# EAGLE board SAM E70-XplainedShield - DualStepperMotorDriver (EAGLE 9.1.3)
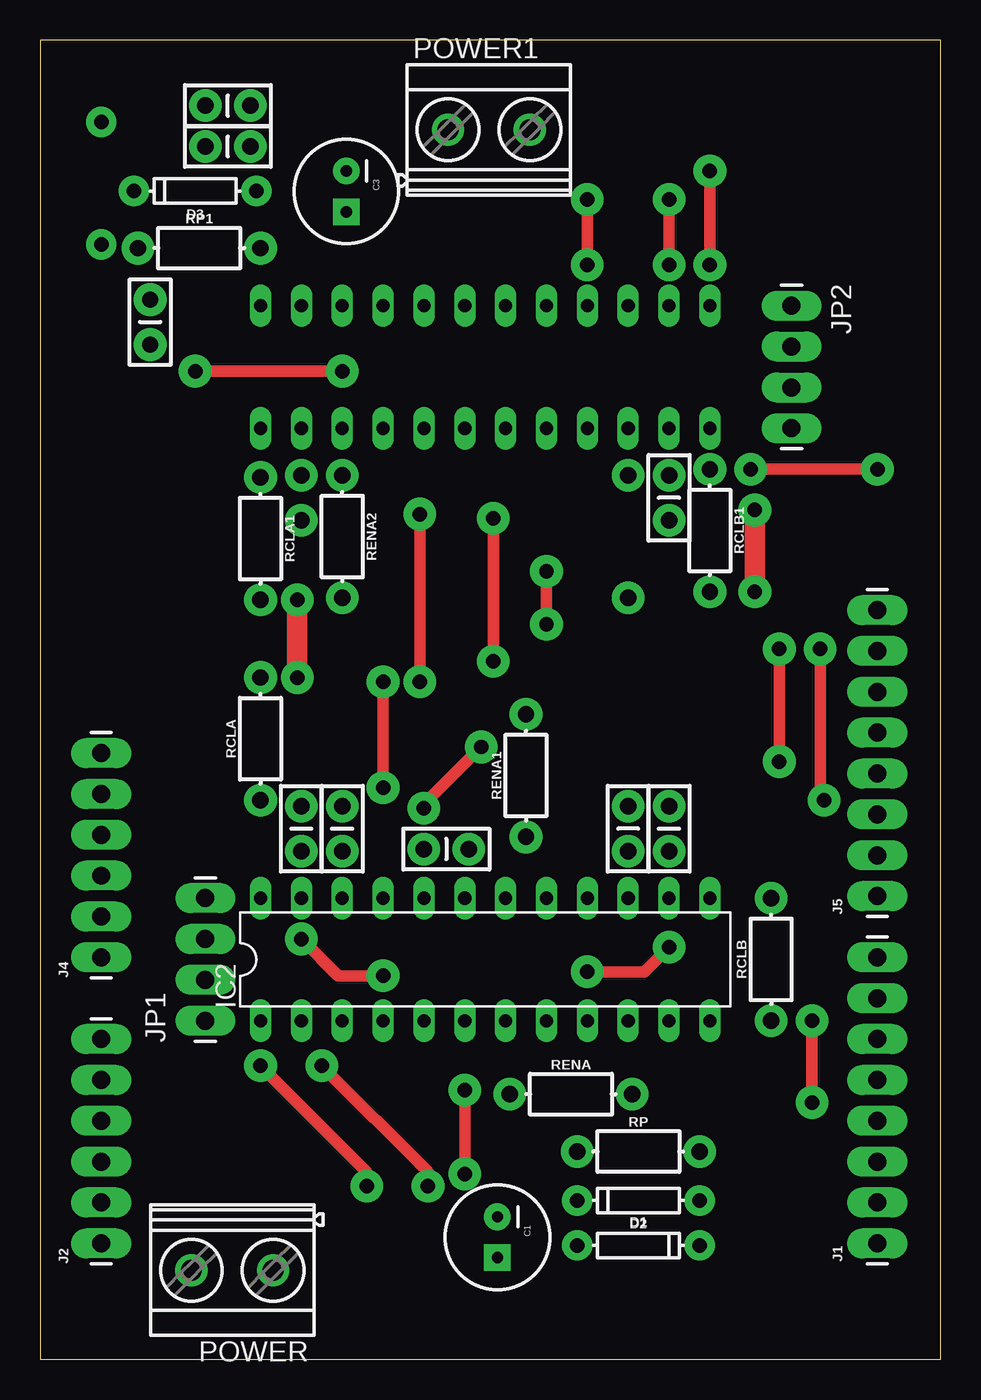
[diagram p0: board, top side]
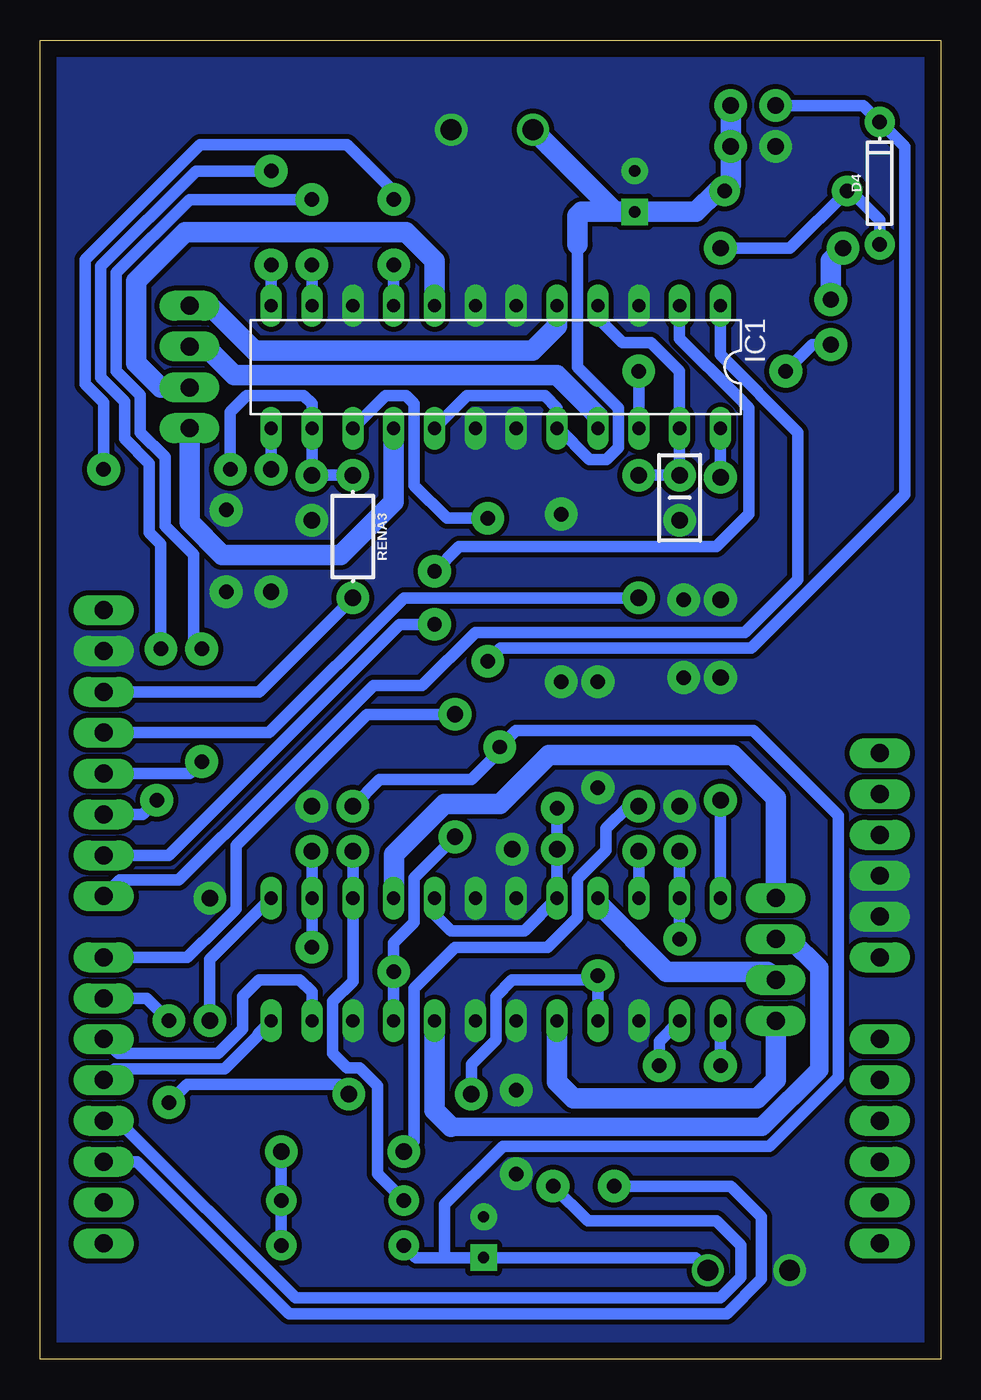
[diagram p1: board, bottom side, seen from below]

Size 56 x 82.01 mm. Coordinates in mm from the lower left corner, seen from the top.
Outline: 0,0 56,0 56,82.01 0,82.01 0,0
Copper layers (1*16): Top 0.035mm / dielectric 1.5mm / Bottom 0.035mm
Design rules "default *": minimum track width 24mil, minimum drill 0.35mm, track to track 10mil, track to pad 10mil, pad to pad 10mil, via to via 10mil, smd to smd 6mil, copper to edge 40mil, drill to drill 6mil, minimum pad ring 10mil, minimum via ring 8mil, stop-mask expansion 4mil, vias tented up to drill 0mil, thermal gap 10mil
Net classes: 0 default: width 0.7 mm, drill 0.9 mm, clearance 0.205 mm

## Footprints (pad centres in the part's own frame; a part is rotated, then mirrored left to right if it is on the bottom)
CPOL-RADIAL-100UF-25V = drill 0.7 pad 1.651 square: 1 1.27,0 | drill 0.7 pad 1.651: 2 -1.27,0
CAP-PTH-SMALL-KIT = drill 1.016 pad 2.032: 1 -1.397,0; 2 1.397,0
DIODE-1N4148 = drill 0.9 pad 1.88: A -3.81,0; C 3.81,0
DIL24S = drill 0.813 long: 1 -13.97,-3.81; 2 -11.43,-3.81; 3 -8.89,-3.81; 4 -6.35,-3.81; 5 -3.81,-3.81; 6 -1.27,-3.81; 7 1.27,-3.81; 8 3.81,-3.81; 9 6.35,-3.81; 10 8.89,-3.81; 11 11.43,-3.81; 12 13.97,-3.81; 13 13.97,3.81; 14 11.43,3.81; 15 8.89,3.81; 16 6.35,3.81; 17 3.81,3.81; 18 1.27,3.81; 19 -1.27,3.81; 20 -3.81,3.81; 21 -6.35,3.81; 22 -8.89,3.81; 23 -11.43,3.81; 24 -13.97,3.81
1X08_LONGPADS = drill 1.118 pad 1.88 long: 1 0,0; 2 2.54,0; 3 5.08,0; 4 7.62,0; 5 10.16,0; 6 12.7,0; 7 15.24,0; 8 17.78,0
1X06_LONGPADS = drill 1.118 pad 1.88 long: 1 0,0; 2 2.54,0; 3 5.08,0; 4 7.62,0; 5 10.16,0; 6 12.7,0
1X04_LONGPADS = drill 1.118 pad 1.88 long: 1 0,0; 2 2.54,0; 3 5.08,0; 4 7.62,0
MKDSN1,5/2-5,08 = drill 1.3 pad 2: 1 -2.561,0.025; 2 2.519,0.025
AXIAL-0.3-KIT = drill 1.016 pad 2.032: P$1 -3.81,0; P$2 3.81,0

## Placement (x,y rotation side)
C1  100uF  [CPOL-RADIAL-100UF-25V]  28.43,7.59 270 top
C2  100nF  [CAP-PTH-SMALL-KIT]  25.26,31.72 0 top
C3  100uF  [CPOL-RADIAL-100UF-25V]  19.03,72.61 270 top
C4  100nF  [CAP-PTH-SMALL-KIT]  11.67,75.41 180 top
CBOOT  220nF  [CAP-PTH-SMALL-KIT]  36.56,32.99 270 top
CBOOT1  220nF  [CAP-PTH-SMALL-KIT]  11.67,77.95 180 top
CENA  10nF  [CAP-PTH-SMALL-KIT]  16.24,32.99 90 top
CENA1  10nF  [CAP-PTH-SMALL-KIT]  39.1,32.99 90 top
CENA2  10nF  [CAP-PTH-SMALL-KIT]  16.24,53.56 270 bottom
CENA3  10nF  [CAP-PTH-SMALL-KIT]  39.1,53.56 270 top
CP  10nF  [CAP-PTH-SMALL-KIT]  18.78,32.99 90 top
CP1  10nF  [CAP-PTH-SMALL-KIT]  6.84,64.48 90 top
D1  200mA/100V/1V  [DIODE-1N4148]  37.2,7.08 0 top
D2  200mA/100V/1V  [DIODE-1N4148]  37.2,9.87 180 top
D3  200mA/100V/1V  [DIODE-1N4148]  9.64,72.64 180 top
D4  200mA/100V/1V  [DIODE-1N4148]  3.79,73.12 90 bottom
IC1  L6206N  [DIL24S]  27.67,61.69 180 bottom
IC2  L6206N  [DIL24S]  27.67,24.86 0 top
J1  [1X08_LONGPADS]  52.05,7.21 90 top
J2  [1X06_LONGPADS]  3.79,7.21 90 top
J4  [1X06_LONGPADS]  3.79,24.99 90 top
J5  [1X08_LONGPADS]  52.05,28.8 90 top
JP1  [1X04_LONGPADS]  10.27,21.05 90 top
JP2  [1X04_LONGPADS]  46.72,65.5 270 top
POWER  [MKDSN1,5/2-5,08]  11.92,5.56 180 top
POWER1  [MKDSN1,5/2-5,08]  27.92,76.42 0 top
RCLA  5K  [AXIAL-0.3-KIT]  13.7,38.58 90 top
RCLA1  5K  [AXIAL-0.3-KIT]  13.7,51.02 270 top
RCLB  5K  [AXIAL-0.3-KIT]  45.45,24.86 90 top
RCLB1  5K  [AXIAL-0.3-KIT]  41.64,51.53 270 top
RENA  100K  [AXIAL-0.3-KIT]  33,16.48 0 top
RENA1  100K  [AXIAL-0.3-KIT]  30.21,36.29 90 top
RENA2  100K  [AXIAL-0.3-KIT]  18.78,51.15 270 top
RENA3  100K  [AXIAL-0.3-KIT]  36.56,51.15 270 bottom
RP  100R  [AXIAL-0.3-KIT]  37.2,12.92 0 top
RP1  100R  [AXIAL-0.3-KIT]  9.89,69.08 0 top

## Library data of the parts
C1-C4 CBOOT CBOOT1 CENA CENA1-CENA3 CP CP1 = SparkFun-Capacitors
D1-D4 = SparkFun-DiscreteSemi; PROD_ID: DIO-08378
IC1 IC2 = L6206
J1 J2 J4 J5 JP1 JP2 = SparkFun-Connectors
POWER POWER1 = con-phoenix-508
RCLA RCLA1 RCLB RCLB1 RENA RENA1-RENA3 RP RP1 = SparkFun-Resistors

## Nets
13_1: IC2.13 RCLB.P$1
13_2: IC1.13 RCLB1.P$1
14_1: CENA1.1 IC2.9 IC2.14 RENA1.P$1
14_2: CENA3.1 IC1.9 IC1.14 RENA3.P$1
15_1: CBOOT.2 D2.C IC2.15
15_2: CBOOT1.2 D4.C IC1.15
22_1: CP.1 IC2.22
22_2: CP1.1 IC1.22
23_1: CENA.1 IC2.4 IC2.23 RENA.P$1
23_2: CENA2.1 IC1.4 IC1.23 RENA2.P$1
24_1: IC2.24 RCLA.P$1
24_2: IC1.24 RCLA1.P$1
AREF: J5.8
EN_A_1: J1.7 RENA.P$2
EN_A_2: J5.5 RENA2.P$2
EN_B_1: J1.8 RENA1.P$2
EN_B_2: J5.6 RENA3.P$2
GND: C1.2 C2.2 C3.2 C4.2 CENA1.2 CENA2.2 CENA3.2 CENA.2 IC1.3 IC1.6 IC1.7 IC1.10 IC1.18 IC1.19 IC2.3 IC2.6 IC2.7 IC2.10 IC2.18 IC2.19 J4.2 J4.3 J5.7 POWER1.2 POWER.2 RCLA1.P$2 RCLA.P$2 RCLB1.P$2 RCLB.P$2
IN1_A_1: IC2.1 J1.3
IN1_A_2: IC1.1 J5.1
IN1_B_1: IC2.12 J1.5
IN1_B_2: IC1.12 J5.3
IN2_A_1: IC2.2 J1.4
IN2_A_2: IC1.2 J5.2
IN2_B_1: IC2.11 J1.6
IN2_B_2: IC1.11 J5.4
MOTOR_A1_1: IC2.5 JP1.1
MOTOR_A1_2: IC1.5 JP2.1
MOTOR_A2_1: IC2.21 JP1.2
MOTOR_A2_2: IC1.21 JP2.2
MOTOR_B1_1: IC2.8 JP1.3
MOTOR_B1_2: IC1.8 JP2.3
MOTOR_B2_1: IC2.16 JP1.4
MOTOR_B2_2: IC1.16 JP2.4
N$1: CP1.2 RP1.P$1
N$2: CP.2 RP.P$1
N$3: D1.C D2.A RP.P$2
N$4: D3.C D4.A RP1.P$2
VCC_MOTOR_1: C1.1 C2.1 CBOOT.1 D1.A IC2.17 IC2.20 POWER.1
VCC_MOTOR_2: C3.1 C4.1 CBOOT1.1 D3.A IC1.17 IC1.20 POWER1.1

## Tracks (layer width: path | path; a pad name or v marks a point on that pad's centre or on a via)
13_1
  Bottom 0.7: IC2.13 45.45,24.86
  Bottom 0.711: 45.45,24.86 RCLB.P$1
13_2
  Bottom 0.711: RCLB1.P$1 IC1.13
14_1  (via drill 0.9 pad 2.03)
  Top 0.711: v34.02,24.1 37.58,24.1 v39.1,25.62
  Bottom 0.711: v39.1,25.62 IC2.14 CENA1.1 | RENA1.P$1 32.75,29.94 32.75,27.15 34.02,25.88 v34.02,24.1 IC2.9
14_2  (via drill 0.9 pad 2.03)
  Top 0.711: v44.18,55.34 v52.05,55.34 | v34.02,72.1 v34.02,68.04
  Bottom 0.7: RENA3.P$1 CENA3.1 IC1.14
  Bottom 0.711: IC1.14 39.1,59.4 39.61,59.91 43.16,59.91 44.18,58.9 v44.18,55.34 | v52.05,55.34 52.05,59.49 53.2,60.63 53.2,68.36 46.05,75.51 36.92,75.51 34.02,72.61 v34.02,72.1 | v34.02,68.04 IC1.9
15_1
  Bottom 0.711: D2.C 34.59,11.08 35.04,11.53 35.04,17 36.14,18.1 36.92,18.1 37.83,19.02 37.83,22.24 36.56,23.51 IC2.15 CBOOT.2
15_2  (via drill 0.9 pad 2.03)
  Top 0.711: v28.18,52.29 v28.18,43.4
  Bottom 0.711: CBOOT1.2 4.81,77.95 D4.C 2.25,75.38 2.25,53.75 11.78,44.22 27.36,44.22 v28.18,43.4 | IC1.15 34.53,59.91 33.26,59.91 32.75,59.4 32.75,54.32 30.72,52.29 v28.18,52.29
22_1
  Bottom 0.711: IC2.22 CP.1
22_2  (via drill 0.9 pad 2.03)
  Top 0.711: v18.78,61.44 v9.64,61.44
  Bottom 0.711: IC1.22 v18.78,61.44 | v9.64,61.44 7.99,63.09 CP1.1
23_1  (via drill 0.9 pad 2.03)
  Top 0.711: v16.24,26.13 18.53,23.84 v21.32,23.84
  Bottom 0.711: RENA.P$1 29.19,18.34 27.67,19.86 27.67,22.57 26.65,23.59 21.57,23.59 v21.32,23.84 IC2.4 | CENA.1 IC2.23 v16.24,26.13
23_2
  Bottom 0.711: RENA2.P$1 CENA2.1 IC1.23 16.24,61.44 18.02,63.21 19.8,63.21 21.32,64.74 IC1.4
24_1
  Bottom 0.711: IC2.24 RCLA.P$1
24_2
  Bottom 0.711: RCLA1.P$1 IC1.24
EN_A_1  (via drill 0.9 pad 2.03)
  Top 0.711: v47.99,15.97 v47.99,21.05
  Bottom 0.711: J1.7 49.39,22.45 v47.99,21.05 | v47.99,15.97 46.87,17.09 37.42,17.09 RENA.P$2
EN_A_2
  Bottom 0.711: RENA2.P$2 33.38,47.34 41.77,38.96 J5.5
EN_B_1
  Bottom 0.711: RENA1.P$2 35.68,40.1 43.82,31.96 43.82,28 44.78,27.04 44.79,27.04 46.85,24.99 J1.8
EN_B_2
  Bottom 0.711: J5.6 42.4,41.5 RENA3.P$2
GND  (via drill 0.9 pad 2.03)
  Top 0.711: v23.61,52.55 v23.61,42.13 | v21.32,42.13 v21.32,35.53 | v26.4,16.73 v26.4,11.53
  Top 1.27: v44.43,52.8 v44.43,47.72 | v15.99,42.39 v15.99,47.21
  pour Bottom (isolate 0.305, no thermals): 0,0 56,0 56,82 0,82
IN1_A_1  (via drill 0.9 pad 2.03)
  Top 0.711: v13.7,18.26 20.3,11.65 v20.3,10.76
  Bottom 0.711: v13.7,18.26 IC2.1 | v20.3,10.76 13.06,10.76 11.16,8.86 11.16,5 13.32,2.85 40.53,2.85 49.97,12.29 J1.3
IN1_A_2
  Bottom 0.711: J5.1 51.06,29.79 47.38,29.79 41.89,35.27 41.88,35.27 35.27,41.88 32.24,41.88 28.94,45.18 12.18,45.18 10.4,46.96 8.87,48.48 8.87,57.63 13.7,62.45 IC1.1
IN1_B_1
  Bottom 0.711: IC2.12 42.45,20.24 42.45,20.14 43.12,19.48 44.54,18.05 51.37,18.05 J1.5
IN1_B_2  (via drill 0.9 pad 2.03)
  Top 0.711: v41.64,73.88 v41.64,68.04 | v48.5,44.16 48.5,35.02 v48.75,34.77
  Bottom 0.711: v41.64,73.88 44.18,73.88 46.31,73.88 52.23,67.96 52.23,61.03 50.73,59.53 50.73,57.23 49.21,55.7 49.21,51.4 48.5,50.69 48.5,47.72 v48.5,44.16 | v41.64,68.04 IC1.12 | J5.3 49.64,33.88 v48.75,34.77
IN2_A_1  (via drill 0.9 pad 2.03)
  Top 0.711: v17.51,18.26 24.11,11.65 v24.11,10.76
  Bottom 0.711: v17.51,18.26 17.51,19.78 IC2.2 | v24.11,10.76 21.95,8.6 13.95,8.6 12.43,7.08 12.43,5.1 13.72,3.81 40.13,3.81 51.15,14.83 J1.4
IN2_A_2  (via drill 0.9 pad 2.03)
  Top 0.711: v31.48,48.99 v31.48,45.69
  Bottom 0.711: v31.48,48.99 29.96,50.51 13.95,50.51 11.92,52.55 11.92,58.64 11.92,59.15 12.68,59.91 16.24,63.47 IC1.2 | v31.48,45.69 33.67,45.69 48.02,31.34 J5.2
IN2_B_1
  Bottom 0.711: J1.6 51.16,19.02 44.94,19.02 43.42,20.54 43.42,22.57 42.4,23.59 39.86,23.59 39.1,22.83 IC2.11
IN2_B_2  (via drill 0.9 pad 2.03)
  Top 0.711: v39.1,72.1 v39.1,68.04 | v45.96,37.16 v45.96,44.16
  Bottom 0.711: v39.1,72.1 42.66,72.1 46.72,72.1 51.27,67.56 51.27,61.43 49.77,59.93 49.77,57.63 48.24,56.1 48.24,51.8 46.47,50.02 46.47,44.67 v45.96,44.16 | v39.1,68.04 IC1.11 | J5.4 46.7,36.42 v45.96,37.16
MOTOR_A1_1
  Bottom 1.27: IC2.5 23.86,17.24 22.84,16.22 11.41,16.22 10.27,17.37 JP1.1
MOTOR_A1_2
  Bottom 1.27: JP2.1 45.45,65.5 42.66,62.71 25.38,62.71 23.86,64.23 IC1.5
MOTOR_A2_1
  Bottom 1.27: JP1.2 10.78,24.1 17.06,24.1 21.32,28.36 IC2.21
MOTOR_A2_2
  Bottom 1.27: IC1.21 21.32,58.64 23.86,61.18 43.93,61.18 45.7,62.96 JP2.2
MOTOR_B1_1
  Bottom 1.143: 30.46,14.45 11.13,14.45 7.57,18.01 7.57,24.32 9.38,26.13 JP1.3
  Bottom 1.27: IC2.8 31.48,15.46 30.46,14.45
MOTOR_B1_2
  Bottom 1.27: JP2.3 48.5,60.42 50.02,61.94 50.02,67.02 46.97,70.07 33.26,70.07 31.48,68.29 IC1.8
MOTOR_B2_1
  Bottom 1.27: IC2.16 33.99,28.7 33.99,31.39 30.87,34.51 27.42,34.51 24.37,37.56 12.94,37.56 10.27,34.89 JP1.4
MOTOR_B2_2
  Bottom 1.27: IC1.16 34.02,53.31 37.32,50.01 44.69,50.01 46.72,52.04 JP2.4
N$1
  Bottom 1.27: RP1.P$1 6.84,68.32 CP1.2
N$2
  Bottom 0.711: CP.2 19.41,34.38 20.81,32.99 20.81,31.63 22.59,29.86 22.59,27.48 24.45,25.62 30.21,25.62 32.39,23.44 32.39,23.43 32.75,23.07 32.75,13.56 RP.P$1
N$3
  Bottom 0.711: D1.C D2.A RP.P$2
N$4
  Bottom 0.711: RP1.P$2 11.16,69.08 10.14,69.08 9.38,69.08 D3.C 5.6,72.64 3.79,70.83 D4.A
VCC_MOTOR_1  (via drill 0.9 pad 2.03)
  Top 0.711: v23.86,34.26 23.86,34.51 v27.42,38.07
  Bottom 0.711: POWER.1 15.27,6.32 C1.1 30.84,6.32 | 30.84,6.32 32.62,6.32 D1.A | IC2.17 31.48,27.65 30.46,26.64 25.89,26.64 IC2.20 C2.1 v23.86,34.26 | CBOOT.1 34.91,36.04 29.19,36.04 27.42,37.81 v27.42,38.07 26.4,39.08 11.67,39.08 6.38,33.8 6.38,17.52 10.66,13.25 27.22,13.25 30.84,9.62 30.84,6.32
VCC_MOTOR_2
  Bottom 0.711: IC1.17 29.45,59.91 24.62,59.91 23.86,59.15 IC1.20 23.78,57.88 21.85,55.95 20.79,55.95 20.05,56.69 20.05,59.13 22.59,61.67 22.59,69.31
  Bottom 1.27: CBOOT1.1 C4.1 13.06,73.02 D3.A 13.93,72.64 15.22,71.34 C3.1 20.26,71.34 | POWER1.1 20.26,71.34 | 22.59,69.31 22.59,71.09 22.34,71.34 20.26,71.34